# Altium PCB 05-01889R2.3B_发送.PcbDoc
Units mil, origin at the board's own origin, x right, y up, seen from the top; angles counter-clockwise.
Board outline 4710 x 2910 mil, 4 copper layers (Top Layer, Top, Internal Plane 2, VCC, Internal Plane 1, GND, Bottom Layer, Bottom); 47 components, 33 nets, 169 pads, 29 vias.
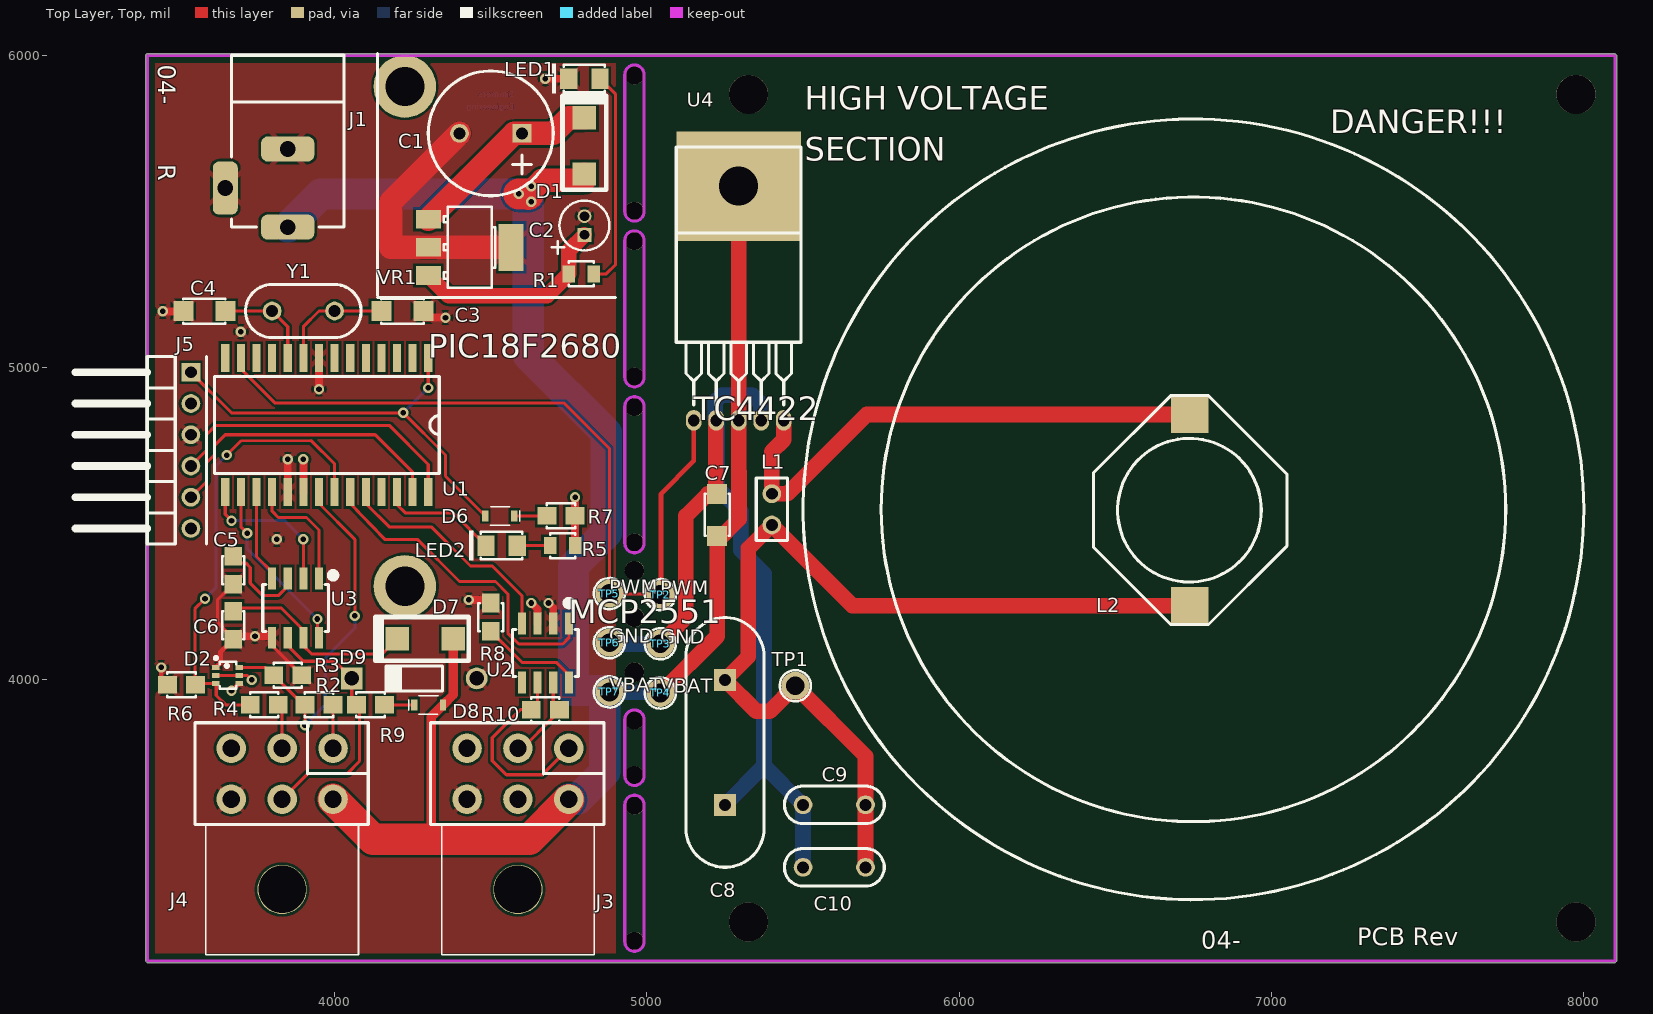
[diagram p0: Top Layer, Top view]
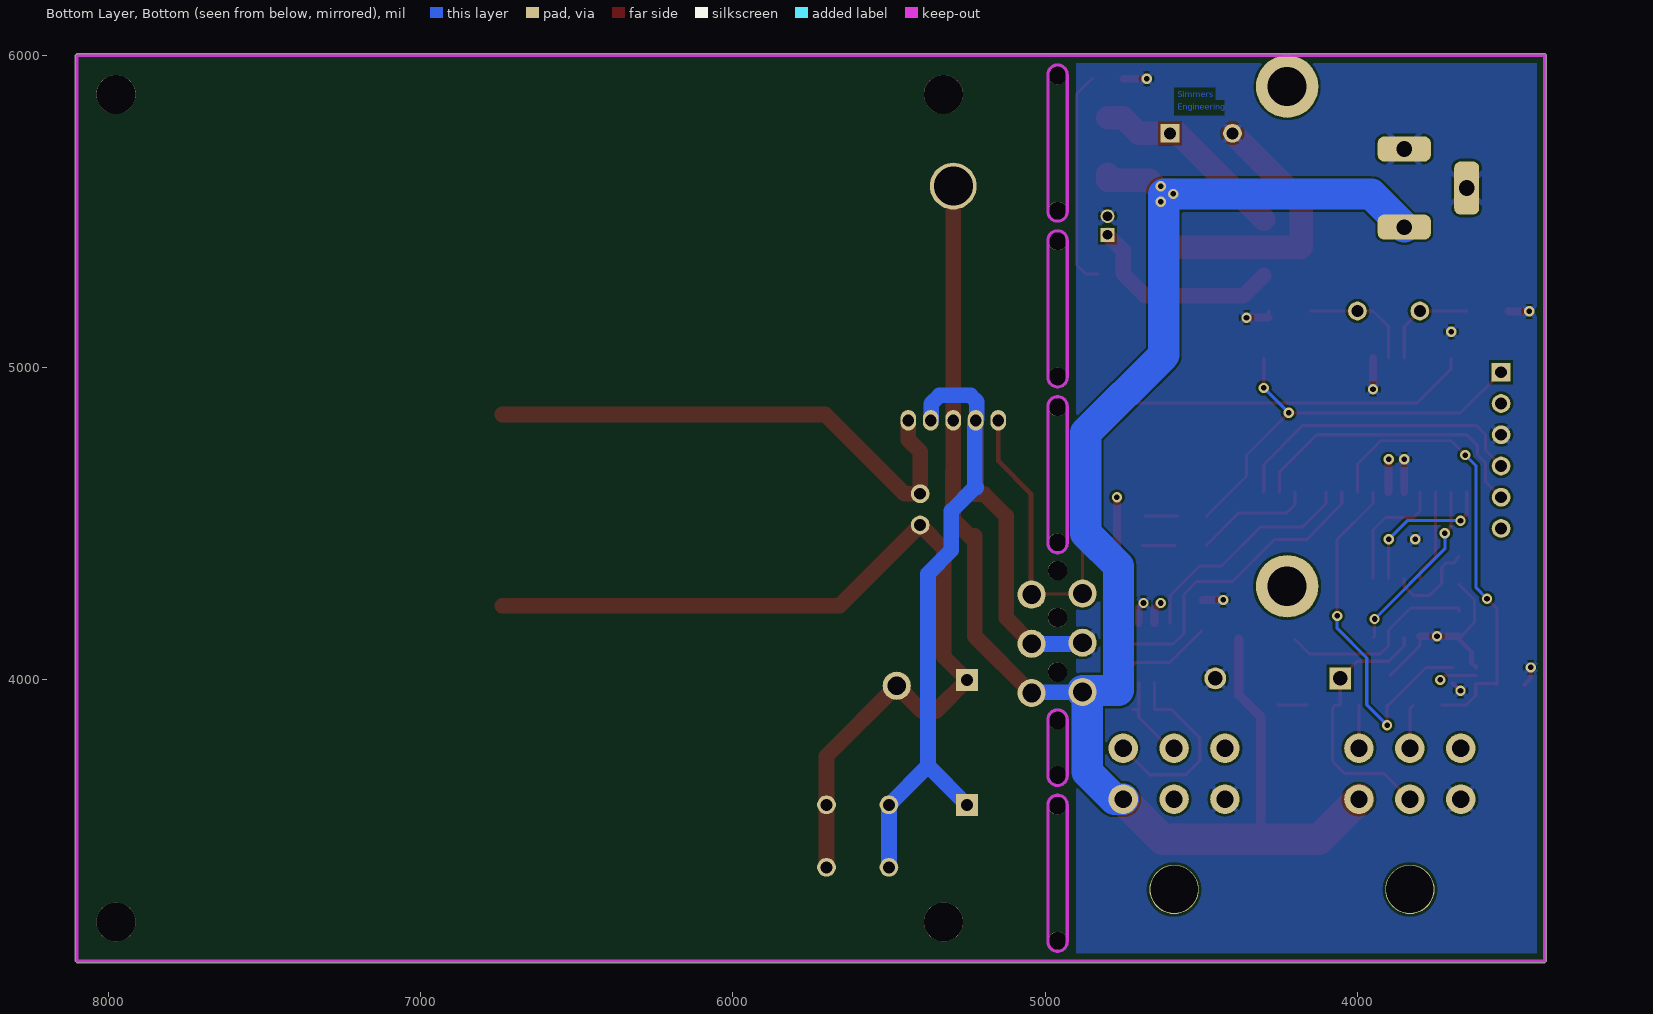
[diagram p1: Bottom Layer, Bottom view, seen from below]
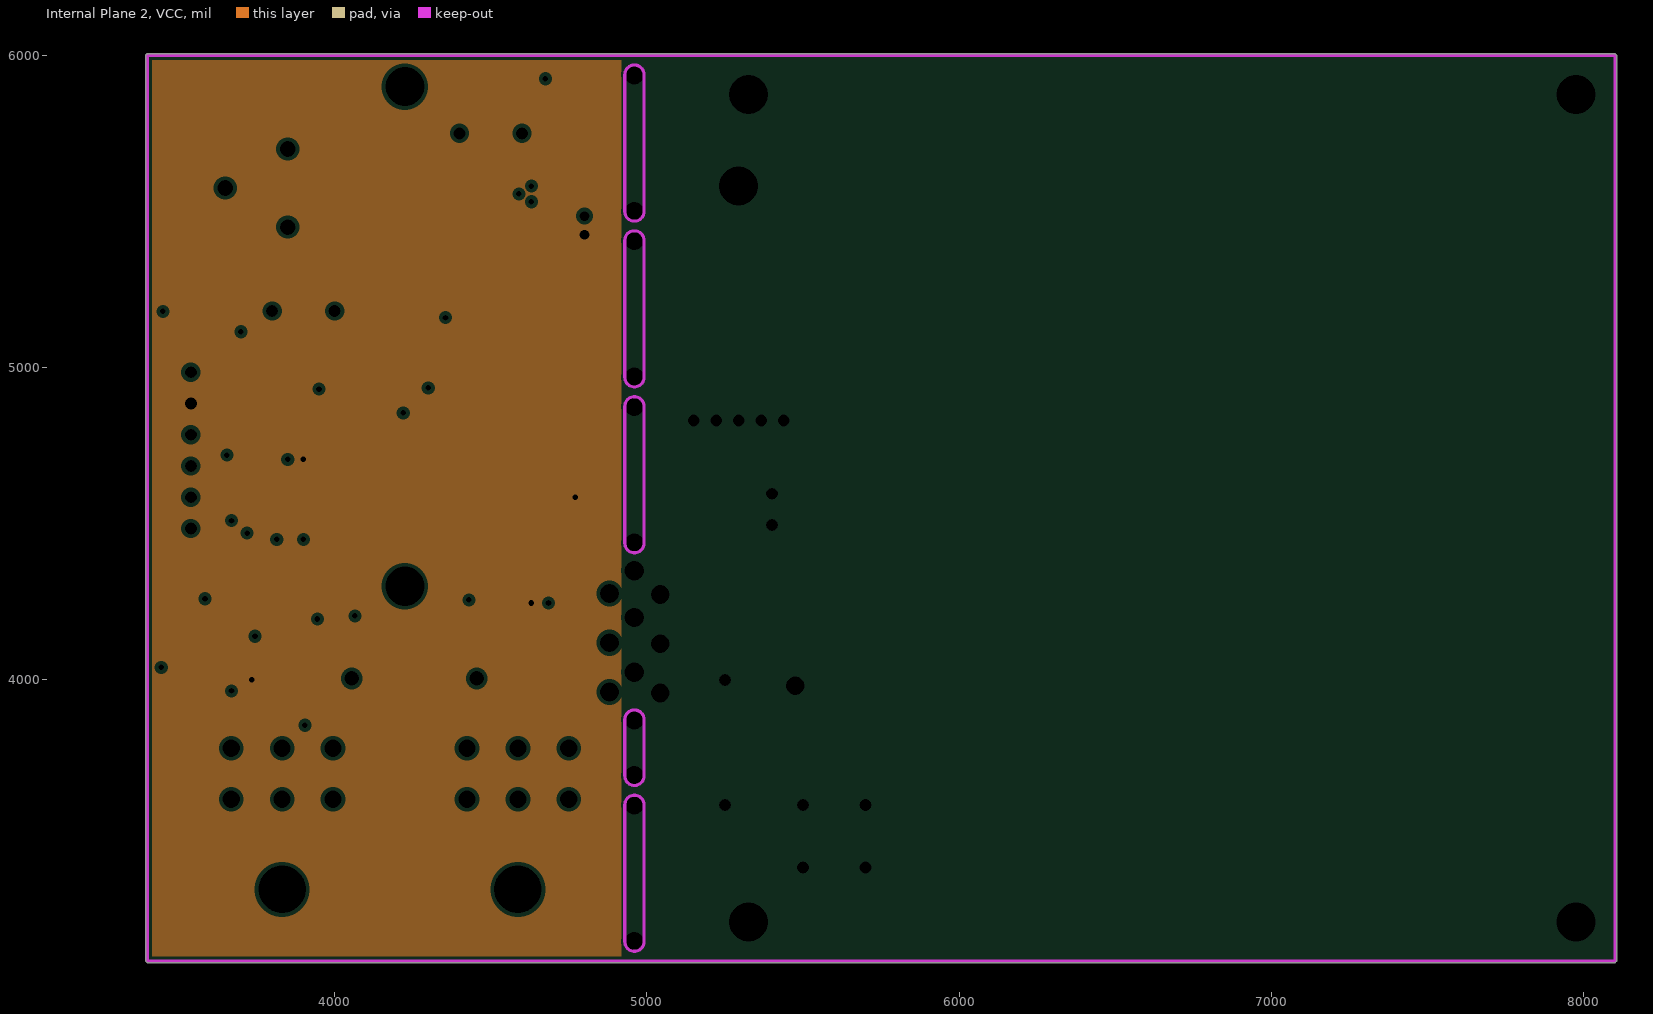
[diagram p2: Internal Plane 2, VCC, clearances drawn from the general rule]
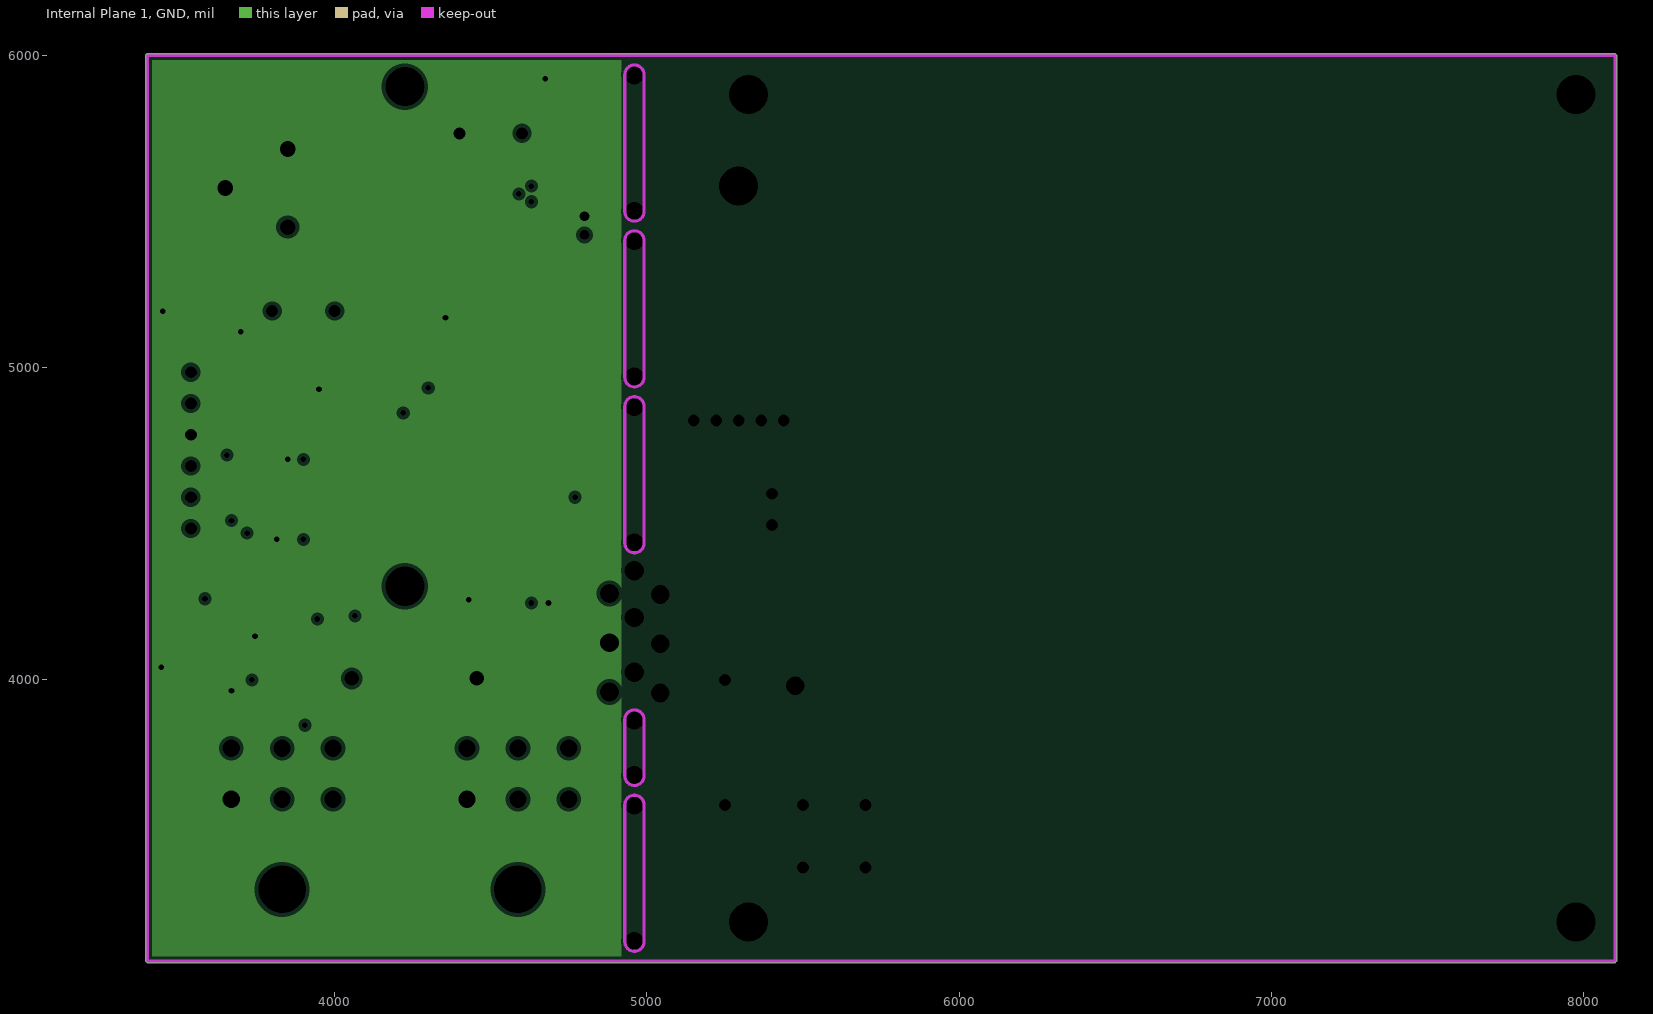
[diagram p3: Internal Plane 1, GND, clearances drawn from the general rule]

## Layer stack, top to bottom
Top Solder, Top Mask: solder mask 0.4, Solder Resist, Dk 3.5
Top Layer, Top: signal copper 1.4
Dielectric1: dielectric 12.6, FR-4, Dk 4.8
Internal Plane 2, VCC: plane copper 1.4
Dielectric3: dielectric 12.6, FR-4, Dk 4.8
Internal Plane 1, GND: plane copper 1.4
Dielectric2: dielectric 12.6, FR-4, Dk 4.8
Bottom Layer, Bottom: signal copper 1.4
Bottom Solder, Bot Mask: solder mask 0.4, Solder Resist, Dk 3.5

## Board outline
3395,3100 3400,3095 8100,3095 8105,3100 8105,6000 8100,6005 3400,6005 3395,6000

## Design rules (kind name [scope] priority, off if disabled: settings)
Clearance "Clearance_Top Layer, Top_PadToPad" [ExistsOnLayer('Top Layer, Top') And IsPad vs ExistsOnLayer('Top Layer, Top') And IsPad] p1: gap=8
Clearance "Clearance_Top Layer, Top_PadToLine" [ExistsOnLayer('Top Layer, Top') And IsPad vs ExistsOnLayer('Top Layer, Top') And IsWire] p2: gap=8
Clearance "Clearance_Top Layer, Top_LineToLine" [ExistsOnLayer('Top Layer, Top') And IsWire vs ExistsOnLayer('Top Layer, Top') And IsWire] p3: gap=8
Clearance "Clearance_Top Layer, Top_ViaToPad" [ExistsOnLayer('Top Layer, Top') And IsVia vs ExistsOnLayer('Top Layer, Top') And IsPad] p4: gap=8
Clearance "Clearance_Top Layer, Top_ViaToLine" [ExistsOnLayer('Top Layer, Top') And IsVia vs ExistsOnLayer('Top Layer, Top') And IsWire] p5: gap=8
Clearance "Clearance_Top Layer, Top_ViaToVia" [ExistsOnLayer('Top Layer, Top') And IsVia vs ExistsOnLayer('Top Layer, Top') And IsVia] p6: gap=8
Clearance "Clearance_Internal Plane 2, VCC_PadToPad" [ExistsOnLayer('Internal Plane 2, VCC') And IsPad vs ExistsOnLayer('Internal Plane 2, VCC') And IsPad] p7: gap=10
Clearance "Clearance_Internal Plane 2, VCC_PadToLine" [ExistsOnLayer('Internal Plane 2, VCC') And IsPad vs ExistsOnLayer('Internal Plane 2, VCC') And IsWire] p8: gap=10
Clearance "Clearance_Internal Plane 2, VCC_LineToLine" [ExistsOnLayer('Internal Plane 2, VCC') And IsWire vs ExistsOnLayer('Internal Plane 2, VCC') And IsWire] p9: gap=10
Clearance "Clearance_Internal Plane 2, VCC_ViaToPad" [ExistsOnLayer('Internal Plane 2, VCC') And IsVia vs ExistsOnLayer('Internal Plane 2, VCC') And IsPad] p10: gap=10
Clearance "Clearance_Internal Plane 2, VCC_ViaToLine" [ExistsOnLayer('Internal Plane 2, VCC') And IsVia vs ExistsOnLayer('Internal Plane 2, VCC') And IsWire] p11: gap=10
Clearance "Clearance_Internal Plane 2, VCC_ViaToVia" [ExistsOnLayer('Internal Plane 2, VCC') And IsVia vs ExistsOnLayer('Internal Plane 2, VCC') And IsVia] p12: gap=10
Clearance "Clearance_Internal Plane 1, GND_PadToPad" [ExistsOnLayer('Internal Plane 1, GND') And IsPad vs ExistsOnLayer('Internal Plane 1, GND') And IsPad] p13: gap=10
Clearance "Clearance_Internal Plane 1, GND_PadToLine" [ExistsOnLayer('Internal Plane 1, GND') And IsPad vs ExistsOnLayer('Internal Plane 1, GND') And IsWire] p14: gap=10
Clearance "Clearance_Internal Plane 1, GND_LineToLine" [ExistsOnLayer('Internal Plane 1, GND') And IsWire vs ExistsOnLayer('Internal Plane 1, GND') And IsWire] p15: gap=10
Clearance "Clearance_Internal Plane 1, GND_ViaToPad" [ExistsOnLayer('Internal Plane 1, GND') And IsVia vs ExistsOnLayer('Internal Plane 1, GND') And IsPad] p16: gap=10
Clearance "Clearance_Internal Plane 1, GND_ViaToLine" [ExistsOnLayer('Internal Plane 1, GND') And IsVia vs ExistsOnLayer('Internal Plane 1, GND') And IsWire] p17: gap=10
Clearance "Clearance_Internal Plane 1, GND_ViaToVia" [ExistsOnLayer('Internal Plane 1, GND') And IsVia vs ExistsOnLayer('Internal Plane 1, GND') And IsVia] p18: gap=10
Clearance "Clearance_Bottom Layer, Bottom_PadToPad" [ExistsOnLayer('Bottom Layer, Bottom') And IsPad vs ExistsOnLayer('Bottom Layer, Bottom') And IsPad] p19: gap=8
Clearance "Clearance_Bottom Layer, Bottom_PadToLine" [ExistsOnLayer('Bottom Layer, Bottom') And IsPad vs ExistsOnLayer('Bottom Layer, Bottom') And IsWire] p20: gap=8
Clearance "Clearance_Bottom Layer, Bottom_LineToLine" [ExistsOnLayer('Bottom Layer, Bottom') And IsWire vs ExistsOnLayer('Bottom Layer, Bottom') And IsWire] p21: gap=8
Clearance "Clearance_Bottom Layer, Bottom_ViaToPad" [ExistsOnLayer('Bottom Layer, Bottom') And IsVia vs ExistsOnLayer('Bottom Layer, Bottom') And IsPad] p22: gap=8
Clearance "Clearance_Bottom Layer, Bottom_ViaToLine" [ExistsOnLayer('Bottom Layer, Bottom') And IsVia vs ExistsOnLayer('Bottom Layer, Bottom') And IsWire] p23: gap=8
Clearance "Clearance_Bottom Layer, Bottom_ViaToVia" [ExistsOnLayer('Bottom Layer, Bottom') And IsVia vs ExistsOnLayer('Bottom Layer, Bottom') And IsVia] p24: gap=8
Clearance Clearance_Design_HoleToHole [(IsVia Or IsThruPin) vs (IsVia Or IsThruPin)] p25: gap=13
Clearance [All] p26: gap=8
PlaneClearance PadClr_125NP [InPadClass('125NP')] p1: clearance=30
PlaneClearance PadClr_P:PX080Y170D050 [InPadClass('P:PX080Y170D050')] p2: clearance=64
PlaneClearance [All] p3: clearance=12
PlaneConnect PadTherm_125NP [InPadClass('125NP')] p1: planeconnectstyle=Relief reliefexpansion=31.25 reliefentries=4 reliefconductorwidth=41.67 reliefairgap=31.25
PlaneConnect PadTherm_1m40 [InPadClass('1m40')] p2: planeconnectstyle=Relief reliefexpansion=13.78 reliefentries=4 reliefconductorwidth=18.37 reliefairgap=13.78
PlaneConnect PadTherm_200R125 [InPadClass('200R125')] p3: planeconnectstyle=Relief reliefexpansion=31.25 reliefentries=4 reliefconductorwidth=41.67 reliefairgap=31.25
PlaneConnect PadTherm_3m86 [InPadClass('3m86')] p4: planeconnectstyle=Relief reliefexpansion=37.99 reliefentries=4 reliefconductorwidth=50.66 reliefairgap=37.99
PlaneConnect PadTherm_60R38 [InPadClass('60R38')] p5: planeconnectstyle=Relief reliefexpansion=9.5 reliefentries=4 reliefconductorwidth=12.67 reliefairgap=9.5
PlaneConnect PadTherm_60S38 [InPadClass('60S38')] p6: planeconnectstyle=Relief reliefexpansion=9.5 reliefentries=4 reliefconductorwidth=12.67 reliefairgap=9.5
PlaneConnect PadTherm_62NP [InPadClass('62NP')] p7: planeconnectstyle=Relief reliefexpansion=15.5 reliefentries=4 reliefconductorwidth=20.67 reliefairgap=15.5
PlaneConnect PadTherm_90R60 [InPadClass('90R60')] p8: planeconnectstyle=Relief reliefexpansion=11 reliefentries=4 reliefconductorwidth=14 reliefairgap=4
PlaneConnect "PadTherm_P:EX120Y120D68A [2]" [InPadClass('P:EX120Y120D68A [2]')] p9: planeconnectstyle=Relief reliefexpansion=0 reliefentries=4 reliefconductorwidth=0 reliefairgap=0
PlaneConnect PadTherm_P:EX60Y60D38A [InPadClass('P:EX60Y60D38A')] p10: planeconnectstyle=Relief reliefexpansion=9.5 reliefentries=4 reliefconductorwidth=12.67 reliefairgap=9.5
PlaneConnect "PadTherm_P:EX70Y70D46A [3]" [InPadClass('P:EX70Y70D46A [3]')] p11: planeconnectstyle=Relief reliefexpansion=11.5 reliefentries=4 reliefconductorwidth=15.33 reliefairgap=11.5
PlaneConnect PadTherm_P:PX080Y170D050 [InPadClass('P:PX080Y170D050')] p12: planeconnectstyle=Relief reliefexpansion=50 reliefentries=4 reliefconductorwidth=25 reliefairgap=15
PlaneConnect PadTherm_P:S150X80Y [InPadClass('P:S150X80Y')] p13: planeconnectstyle=Relief reliefexpansion=0 reliefentries=4 reliefconductorwidth=0 reliefairgap=0
PlaneConnect PadTherm_P:S60X80Y [InPadClass('P:S60X80Y')] p14: planeconnectstyle=Relief reliefexpansion=0 reliefentries=4 reliefconductorwidth=0 reliefairgap=0
PlaneConnect PadTherm_P:SX0.42Y0.6D0T [InPadClass('P:SX0.42Y0.6D0T')] p15: planeconnectstyle=Relief reliefexpansion=0 reliefentries=4 reliefconductorwidth=0 reliefairgap=0
PlaneConnect PadTherm_P:SX20Y35D0T [InPadClass('P:SX20Y35D0T')] p16: planeconnectstyle=Relief reliefexpansion=0 reliefentries=4 reliefconductorwidth=0 reliefairgap=0
PlaneConnect PadTherm_P:SX40Y55D0T [InPadClass('P:SX40Y55D0T')] p17: planeconnectstyle=Relief reliefexpansion=0 reliefentries=4 reliefconductorwidth=0 reliefairgap=0
PlaneConnect PadTherm_P:SX55Y65D0T [InPadClass('P:SX55Y65D0T')] p18: planeconnectstyle=Relief reliefexpansion=0 reliefentries=4 reliefconductorwidth=0 reliefairgap=0
PlaneConnect PadTherm_P:SX60Y56D0T [InPadClass('P:SX60Y56D0T')] p19: planeconnectstyle=Relief reliefexpansion=0 reliefentries=4 reliefconductorwidth=0 reliefairgap=0
PlaneConnect PadTherm_P:SX60Y60D38A [InPadClass('P:SX60Y60D38A')] p20: planeconnectstyle=Relief reliefexpansion=9.5 reliefentries=4 reliefconductorwidth=12.67 reliefairgap=9.5
PlaneConnect PadTherm_P:SX64Y64D0T [InPadClass('P:SX64Y64D0T')] p21: planeconnectstyle=Relief reliefexpansion=0 reliefentries=4 reliefconductorwidth=0 reliefairgap=0
PlaneConnect PadTherm_P:SX70Y26D0T [InPadClass('P:SX70Y26D0T')] p22: planeconnectstyle=Relief reliefexpansion=0 reliefentries=4 reliefconductorwidth=0 reliefairgap=0
PlaneConnect PadTherm_P:SX70Y70D38A [InPadClass('P:SX70Y70D38A')] p23: planeconnectstyle=Relief reliefexpansion=15.5 reliefentries=4 reliefconductorwidth=15.33 reliefairgap=11.5
PlaneConnect PadTherm_P:SX70Y70D46A [InPadClass('P:SX70Y70D46A')] p24: planeconnectstyle=Relief reliefexpansion=11.5 reliefentries=4 reliefconductorwidth=15.33 reliefairgap=11.5
PlaneConnect PadTherm_P:SX75Y75D0T [InPadClass('P:SX75Y75D0T')] p25: planeconnectstyle=Relief reliefexpansion=0 reliefentries=4 reliefconductorwidth=0 reliefairgap=0
PlaneConnect PadTherm_P:SX90Y26D0T [InPadClass('P:SX90Y26D0T')] p26: planeconnectstyle=Relief reliefexpansion=0 reliefentries=4 reliefconductorwidth=0 reliefairgap=0
PlaneConnect PadTherm_P:X400Y350D125 [InPadClass('P:X400Y350D125')] p27: planeconnectstyle=Relief reliefexpansion=27.5 reliefentries=4 reliefconductorwidth=40 reliefairgap=30
PlaneConnect PadTherm_P:X50Y66R38 [InPadClass('P:X50Y66R38')] p28: planeconnectstyle=Relief reliefexpansion=7.25 reliefentries=4 reliefconductorwidth=11.67 reliefairgap=8.75
PlaneConnect PadTherm_P44R31 [InPadClass('P44R31')] p29: planeconnectstyle=Relief reliefexpansion=1.5 reliefentries=4 reliefconductorwidth=12.67 reliefairgap=3
PlaneConnect PadTherm_P44S31 [InPadClass('P44S31')] p30: planeconnectstyle=Relief reliefexpansion=0.5 reliefentries=4 reliefconductorwidth=12.67 reliefairgap=4
PlaneConnect [All] p31: planeconnectstyle=Relief reliefexpansion=20 reliefentries=4 reliefconductorwidth=10 reliefairgap=10
PolygonConnect PolygonConnect_4 [IsPolygon And InNet('GND') And OnLayer('Bottom Layer, Bottom') vs IsVia] p1: connectstyle=Relief reliefconductorwidth=15 reliefentries=4 polygonreliefangle="45 Angle" airgapwidth=10
PolygonConnect PolygonConnect_3 [IsPolygon And InNet('GND') And OnLayer('Bottom Layer, Bottom') vs IsPad] p2: connectstyle=Relief reliefconductorwidth=15 reliefentries=4 polygonreliefangle="45 Angle" airgapwidth=10
PolygonConnect PolygonConnect_2 [IsPolygon And InNet('GND') And OnLayer('Top Layer, Top') vs IsVia] p3: connectstyle=Relief reliefconductorwidth=15 reliefentries=4 polygonreliefangle="45 Angle" airgapwidth=10
PolygonConnect PolygonConnect_1 [IsPolygon And InNet('GND') And OnLayer('Top Layer, Top') vs IsPad] p4: connectstyle=Relief reliefconductorwidth=15 reliefentries=4 polygonreliefangle="45 Angle" airgapwidth=10
PolygonConnect [All] p5: connectstyle=Relief reliefconductorwidth=10 reliefentries=4 polygonreliefangle="90 Angle" airgapwidth=10
RoutingVias [All] p1: holewidth=28 width=50 viastyle="Through Hole" minholewidth=28 minwidth=50 maxholewidth=28 maxwidth=50
SilkToSolderMaskClearance SilkscreenOverComponentPads [IsPad] p1: minsilkscreentomaskgap=10 clearancetoexposedcopper=TRUE
SolderMaskExpansion [All] p1: expansion=4
Width [All] p1: maxlimit=10 minlimit=10 preferedwidth=10
27 further rules are at their usual default settings.

## Classes and differential pairs
pad class P44S31: C2-1
pad class P44R31: C2-2
pad class P:X50Y66R38: U4-1 U4-2 U4-3 U4-4 U4-5
pad class P:X400Y350D125: U4-6
pad class P:SX90Y26D0T: U1-1 U1-2 U1-3 U1-4 U1-5 U1-6 U1-7 U1-8 U1-9 U1-10 U1-11 U1-12 U1-13 U1-14 U1-15 U1-16 U1-17 U1-18 U1-19 U1-20 U1-21 U1-22 U1-23 U1-24 U1-25 U1-26 U1-27 U1-28
pad class P:SX75Y75D0T: D1-1 D1-2 D7-1 D7-2
pad class P:SX70Y70D46A: D9-K
pad class P:SX70Y70D38A: C8-1 C8-2
pad class P:SX70Y26D0T: U2-1 U2-2 U2-3 U2-4 U2-5 U2-6 U2-7 U2-8 U3-1 U3-2 U3-3 U3-4 U3-5 U3-6 U3-7 U3-8
pad class P:SX64Y64D0T: C3-1 C3-2 C4-1 C4-2 C7-1 C7-2
pad class P:SX60Y60D38A: J5-1
pad class P:SX60Y56D0T: C5-A C5-B C6-A C6-B R2-1 R2-2 R3-1 R3-2 R4-1 R4-2 R6-1 R6-2 R7-1 R7-2 R8-1 R8-2 R9-1 R9-2 R10-1 R10-2
pad class P:SX55Y65D0T: LED1-1 LED1-2 LED2-1 LED2-2
pad class P:SX40Y55D0T: R1-1 R1-2 R5-1 R5-2
pad class P:SX20Y35D0T: D6-1 D6-2 D8-1 D8-2
pad class P:SX0.42Y0.6D0T: D2-1 D2-2 D2-3 D2-4 D2-5 D2-6
pad class P:S60X80Y: VR1-1 VR1-2 VR1-3
pad class P:S150X80Y: VR1-4
pad class P:PX080Y170D050: J1-1 J1-2 J1-3
pad class "P:EX70Y70D46A [3]": D9-A
pad class P:EX60Y60D38A: C9-1 C9-2 C10-1 C10-2 J5-2 J5-3 J5-4 J5-5 J5-6
pad class "P:EX120Y120D68A [2]": L2-1 L2-2
pad class 90R60: TP1-1 TP2-1 TP3-1 TP4-1 TP5-1 TP6-1 TP7-1
pad class 62NP: Free-0
pad class 60S38: C1-1
pad class 60R38: C1-2 L1-1 L1-2 Y1-1 Y1-2
pad class 3m86: J3-7 J4-7
pad class 200R125: Free-0
pad class 1m40: J3-1 J3-2 J3-3 J3-4 J3-5 J3-6 J4-1 J4-2 J4-3 J4-4 J4-5 J4-6
pad class 125NP: Free-0

## Components (designator, comment, footprint, x,y, rotation, side; value= is the part's Value field where it differs from the comment)
C1 "10uF" CAPRAD400D200SP 4600,5750 r270 top
C2 "47uF" CAPRAD160D60SP 4800,5425 r180 top
C3 "20pF" CC1206 4150,5181.2 r0 top
C4 "20pF" CC1206 3650,5181.2 r180 top
C5 "1.0uF" CAP0805_CAP0805(Primary) 3675,4396.2 r270 top
C6 "1.0uF" CAP0805_CAP0805(Primary) 3675,4220 r270 top
C7 "0.1uF" CC1206 5225,4461.2 r90 top
C8 "10nF" CAP-ECQ-P4103JU 5250,4000 r270 top
C9 ".200LS" CAP-200LS-NONPOLAR 5700,3600 r180 top
C10 ".200LS" CAP-200LS-NONPOLAR 5700,3400 r180 top
D1 "10MQ100N" DIO-SMAJXXCA 4800,5800 r0 top
D2 "" SOT-363 3620,4040 r270 top
D6 "" DIO-SOD-323 4575,4525 r180 top
D7 "10MQ100N" DIO-SMAJXXCA 4200,4131.2 r90 top
D8 "" DIO-SOD-323 4255,3920 r0 top
D9 "1N4750" DO-41_1N4728_DO-41(Primary) 4055,4005 r0 top
J1 "{Value}" CNN-DC-MOD-2.5MM 3850,5450 r180 top
J3 "" AMP770969 4750,3781.2 r270 top
J4 "" AMP770969 3995,3781.2 r270 top
J5 "{Value}" HDR_1X6_PICKIT2 3540,4985 r0 top
L1 "10-00189" IND-AIR-10-00189-500V 5400,4596.2 r270 top
L2 "DO5022P" IND-DO5022P-SMT 6737.5,4849.95 r270 top
LED1 "GRN" LED-SML-LX231C-TR-RED-2MM-3MM 4750,5925 r0 top
LED2 "Yellow" LED-SML-LX231C-TR-RED-2MM-3MM 4485,4430 r0 top
R1 "1K" RES0805#1 4750,5300 r0 top
R2 "25K" RES0805#2 3905,3920 r0 top
R3 "15K" RES0805#2 3805,4015 r0 top
R4 "25K" RES0805#2 3730,3920 r0 top
R5 "270" RES0805#1 4770,4430 r180 top
R6 "15K" RES0805#2 3555,3985 r180 top
R7 "" RES0805#2 4770,4525 r180 top
R8 "4.7K" RES0805#2 4500,4156.2 r90 top
R9 "1K" RES0805#2 4160,3920 r180 top
R10 "120" RES0805#2 4720,3905 r180 top
TP1 "" TSP-P90R60 5475,3981.2 r0 top
TP2 "PWM" TSP-P90R60 5043.11,4273.21 r0 top
TP3 "GND" TSP-P90R60 5043.11,4115.73 r0 top
TP4 "VBAT" TSP-P90R60 5043.11,3958.25 r0 top
TP5 "PWM" TSP-P90R60 4880,4276.55 r0 top
TP6 "GND" TSP-P90R60 4880,4119.07 r0 top
TP7 "VBAT" TSP-P90R60 4880,3961.59 r0 top
U1 "PIC18F2680" SO28-3 4300,5031.2 r270 top
U2 "MCP2551" SO8_150 4750,4181.2 r270 top
U3 "" SO8_150 3950,4325 r270 top
U4 "TC4422" TO220-5LEAD-TAB 5150,4831.2 r0 top
VR1 "LM2937ET-5.0" SOT223 4300,5475 r270 top
Y1 "20.0MHz" XTL-200LS-PTH-CAN 3800,5181.2 r90 top

## Footprints (in the part's own frame and the unit in brackets; to place one, negate y for a bottom-side part, rotate by r counter-clockwise, add the part's x,y. Pads: shape width x height; smd on the part's side, far side on the other; paste and mask are expansions set on the pad)
AMP770969 [mm]
  round 2.4 hole 1.4: 1(0,0) 2(0,-4.14) 3(0,-8.28) 4(4.14,0) 5(4.14,-4.14) 6(4.14,-8.28)
  round 4 hole 3.86: 7(11.48,-4.14)
  silkscreen extent -2.07,-11.24 16.81,2.86
CAP0805_CAP0805(Primary) [mil]
  rect 60x56 smd: A(0,0) B(90,0)
  silkscreen extent 0,-35 90,35
CAP-200LS-NONPOLAR [mil]
  round 60 hole 38: 1(0,0) 2(200,0)
  silkscreen extent -60,-60 260,60
CAP-ECQ-P4103JU [mil]
  rect 70x70 hole 38: 1(0,0) 2(400,0)
  silkscreen extent -200,-125 600,125
CAPRAD160D60SP [mil]
  rect 44x44 hole 31: 1(0,0)
  round 44 hole 31: 2(0,-60)
  silkscreen extent -80,-110 105,60
CAPRAD400D200SP [mil]
  rect 60x60 hole 38: 1(0,0)
  round 60 hole 38: 2(0,-200)
  silkscreen extent -200,-300 200,100
CC1206 [mil]
  rect 64x64 smd: 1(0,0) 2(134,0)
  silkscreen extent 0,-40 135,40
CNN-DC-MOD-2.5MM [mil]
  rrect50% 170x80 hole 50: 1(0,0) 2(0,-250)
  rrect50% 80x170 hole 50: 3(200,-125)
  silkscreen extent -180,-550 180,0
DIO-SMAJXXCA [mil]
  rect 75x75 smd: 1(0,0) 2(0,-180)
  silkscreen extent -70,-230 70,70
DIO-SOD-323 [mil]
  rect 20x35 smd: 1(92.5,0) 2(0,0)
  silkscreen extent -18,-30 76,30
DO-41_1N4728_DO-41(Primary) [mil]
  round 70 hole 46: A(400,0)
  rect 70x70 hole 46: K(0,0)
  silkscreen extent 110,-40 290,40
HDR_1X6_PICKIT2 [mil]
  rect 60x60 hole 38: 1(0,0)
  round 60 hole 38: 2(0,-100) 3(0,-200) 4(0,-300) 5(0,-400) 6(0,-500)
  silkscreen extent -370,-550 50,50
IND-AIR-10-00189-500V [mil]
  round 60 hole 38: 1(0,0) 2(100,0)
  silkscreen extent -1200,-50 1300,2600
IND-DO5022P-SMT [mil]
  rect 120x120 smd: 1(0,0) 2(612.2,0)
  silkscreen extent -61,-307 672,312
LED-SML-LX231C-TR-RED-2MM-3MM [mil]
  rect 55x65 smd: 1(0,0) 2(100,0)
  silkscreen extent -53,-47 116,47
RES0805#1 [mil]
  rect 40x55 smd: 1(0,0) 2(80,0)
  silkscreen extent 0,-40 80,40
RES0805#2 [mil]
  rect 60x56 smd: 1(0,0) 2(90,0)
  silkscreen extent 0,-40 90,40
SO8_150 [mil]
  rect 70x26 smd: 1(0,0) 2(0,-50) 3(0,-100) 4(0,-150) 5(190,-150) 6(190,-100) 7(190,-50) 8(190,0)
  silkscreen extent -75,-180 170,30
SO28-3 [mil]
  rect 90x26 smd: 1(0,0) 2(0,-50) 3(0,-100) 4(0,-150) 5(0,-200) 6(0,-250) 7(0,-300) 8(0,-350) 9(0,-400) 10(0,-450) 11(0,-500) 12(0,-550) 13(0,-600) 14(0,-650) 15(430,-650) 16(430,-600) 17(430,-550) 18(430,-500) 19(430,-450) 20(430,-400) 21(430,-350) 22(430,-300) 23(430,-250) 24(430,-200) 25(430,-150) 26(430,-100) 27(430,-50) 28(430,0)
  silkscreen extent 60,-685 370,35
SOT223 [mil]
  rect 60x80 smd: 1(0,0) 2(90,0) 3(180,0)
  rect 150x80 smd: 4(90,265)
  silkscreen extent -40,50 220,215
SOT-363 [mm]
  rect 0.42x0.6 smd: 1(0,0) 2(0.65,0) 3(1.3,0) 4(1.3,1.9) 5(0.65,1.9) 6(0,1.9)
  silkscreen extent -0.89,-0.13 1.74,1.66
TO220-5LEAD-TAB [mil]
  oval 50x66 hole 38: 1(0,0) 2(72,0) 3(144,0) 4(216,0) 5(288,0)
  rect 400x350 / inner round 150 / far side round 150 hole 125: 6(144,750)
  silkscreen extent -56,50 344,875
TSP-P90R60 [mil]
  round 90 hole 60: 1(0,0)
  silkscreen extent -50,-50 50,50
XTL-200LS-PTH-CAN [mil]
  round 60 hole 38: 1(0,0) 2(0,-200)
  silkscreen extent -85,-285 85,85

## Part data
C5 C6: "Capacitor"
D6 D8: "Leadless Schottky Rectifier, 1 Ampere"
D9: "Glass Zener Diode, 500 Milliwatt"
LED1 LED2: "Light Emitting Diode"

## Free pads (board coordinates)
  round 200 hole 125: 0(4225,4300) 0(4225,5900)
  round 62 hole 62 unplated: 0(4960,3162) 0(4960,3600) 0(4960,3693) 0(4960,3873) 0(4960,4025) 0(4960,4200) 0(4960,4350) 0(4960,4438) 0(4960,4876) 0(4960,4969) 0(4960,5407) 0(4960,5500) 0(4960,5938)
  round 125 hole 125 unplated: 0(5325,3224.95) 0(5325,5874.95) 0(7975,3224.95) 0(7975,5874.95)

## Via types
v1: diameter 33, hole 18, Top Layer, Top to Bottom Layer, Bottom, 29 vias

## Nets (pads, with @x,y where several pads share a name; then routed paths per layer and width w, separated by ;. In a path a pad name is that pad's centre, name@x,y a point inside that pad or via, vN(x,y) a via of type N, cw(c..) or ccw(c..) an arc to the next point about the centre after c; other vN are vias at no path point)
GND: C1.2 C2.2 C3.2 C4.2 C5.B C6.B C7.2 C8.2 C9.2 C10.2 D2.1 D2.4 D9.A J1.2 J1.3 J3.6 J4.6 J5.3 LED1.1 R3.2 R6.2 R8.2 TP3.1 TP6.1 U1.8 U1.19 U2.2 U3.5 U4.2 U4.4 VR1.2 VR1.4 | length 5139.8
  Top Layer, Top w10: C6.B@3675,4140 C6.B 3625,4186.2 3625,4256.2 C5.B ; U3.5@3800,4140 U3.5 3800,4110 3865,4045 R3.2 ; C3.2 4284,5167.2 C3.2@4285,5160 ; R8.2@4495,4256.2 4500,4251.2 R8.2
  Top Layer, Top w15: v1(3445,4040) 3445,4005 R6.2 ; D2.1 3635,4055 3635,4090 C6.B ; v1(3670,3965) 3670.98,3965 D2.4
  Top Layer, Top w25: v1(3450,5180) 3515,5180 C4.2 ; C6.B@3675,4140 v1(3745,4140) U3.5@3800,4140 ; U1.19 v1(3850,4706.2) ; v1(3950,4931.2) U1.8 ; C3.2@4285,5160 v1(4355,5160) ; v1(4430,4256.2) R8.2@4495,4256.2 ; v1(4675,5925) LED1.1 ; v1(4685,4246.2) 4700,4231.2 U2.2
  Top Layer, Top w50: TP3.1 5043.11,4116.31 5044,4117.2 5125,4200 5125,4525 5195.2,4595.2 C7.2@5224.8,4595.2 ; U4.2 5221.2,4831.2 5220,4830 5220,4600 C7.2@5224.8,4595.2 ; C7.2@5224.8,4595.2 C7.2 C7.2@5224.8,4595.2
  Top Layer, Top w75: C1.2 4180,5530 4180,5385 VR1.2 4560,5385 VR1.4
  Bottom Layer, Bottom w50: TP6.1 4884.07,4115 5040,4115 5040.73,4115.73 TP3.1 ; 5220,4616.2 5225,4616.2 ; C8.2 5375,3725 ; U4.4 5365,4831.2 5365,4884.2 5338,4911.2 5239,4911.2 5219,4891.2 5219,4834.2 U4.2 5225,4831.2 5225,4616.2 ; C10.2 C9.2 5375,3725 ; 5225,4616.2 5300,4541.2 5300,4416.2 5375,4340 5375,3725
  other v1: 3815,4450 3700,5115
N17857: C3.1 U1.9 Y1.2 | length 370.7
  Top Layer, Top w10: U1.9 3900,5131.2 3950,5181.2 Y1.2 C3.1
N17918: C4.1 U1.10 Y1.1 | length 320.7
  Top Layer, Top w10: C4.1 Y1.1 3850,5131.2 U1.10
N18217: D6.1 J5.1 U1.1 | length 1381.9
  Top Layer, Top w10: J5.1 3670,4855 v1(4220,4855) 4355,4720 4355,4652.5 D6.1 ; v1(4300,4935) U1.1
  Bottom Layer, Bottom w10: v1(4220,4855) v1(4300,4935)
N18258: D6.2 R7.2 | length 105
  Top Layer, Top w10: D6.2 R7.2
N18506: U1.15 U3.2 | length 479.3
  Top Layer, Top w10: U1.15 3650,4530 v1(3670,4510) ; U3.2 v1(3900,4450)
  Bottom Layer, Bottom w10: v1(3670,4510) 3840,4510 v1(3900,4450)
N18553: U1.18 U3.1 | length 391.1
  Top Layer, Top w10: U1.18 3800,4540 3820,4520 3910,4520 3950,4480 3950,4345 U3.1
N18703: U1.17 U3.4 | length 296.9
  Top Layer, Top w10: U1.17 3750,4395 3800,4345 U3.4
N18865: U1.16 U3.8 | length 569.8
  Top Layer, Top w10: U1.16 3700,4490 v1(3720,4470) ; v1(3945,4195) 3945,4140 U3.8
  Bottom Layer, Bottom w10: v1(3720,4470) 3720,4420 v1(3945,4195)
N19404: D9.K J4.5 R9.2 U3.6 | length 856.1
  Top Layer, Top w10: J4.5 3913.8,3700 4040,3700 4080,3740 4080,3910 R9.2 4055,3920 D9.K 4000,4060 3900,4060 3850,4110 U3.6
N62567: U1.23 U2.1 | length 1051.8
  Top Layer, Top w10: U1.23 4050,4565 4160,4450 4265,4450 4400,4315 4515,4315 4555,4275 4555,4150 4590,4115 4730,4115 4750,4135 U2.1
N62711: U1.24 U2.4 | length 747.2
  Top Layer, Top w10: U1.24 4100,4565 4175,4490 4310,4490 4435,4365 4505,4365 4600,4270 U2.4
N68412: C6.A D7.1 U3.7 | length 645.7
  Top Layer, Top w10: C6.A 3675,4230 3830,4230 3900,4160 U3.7 3900,4110 3926.86,4083.14 4153.14,4083.14 4200,4130 D7.1
N68746: D8.2 R9.1 | length 95
  Top Layer, Top w10: R9.1 D8.2
N71335: C5.A U3.3 | length 296.2
  Top Layer, Top w10: C5.A 3690,4375 3715,4375 3730,4360 3730,4310 3770,4270 3820,4270 3850,4300 U3.3
N74400: D2.6 R2.1 R3.1 U1.21 | length 1185
  Top Layer, Top w10: D2.6 3780,4040 R3.1 3900,3920 R2.1 v1(3905,3855) ; U1.21 3950,4565 4065,4450 v1(4065,4205)
  Bottom Layer, Bottom w10: v1(3905,3855) 3970,3920 3970,4070 4065,4165 v1(4065,4205)
N82912: J5.4 U1.28 | length 983.7
  Top Layer, Top w10: J5.4 3590,4735 3590,4785 3620,4815 4175,4815 4300,4690 U1.28
N84671: J5.5 U1.27 | length 959.1
  Top Layer, Top w10: J5.5 3590,4635 3590,4695 3615,4720 3615,4750 3650,4785 4130,4785 4250,4665 U1.27
N92818: J3.2 R10.1 U2.7 | length 286.1
  Top Layer, Top w10: J3.2 4588.21,3780 4600,3780 4700,3880 R10.1@4700,3905 ; U2.7 R10.1@4700,3905 ; R10.1 R10.1@4700,3905
N93019: J3.1 R10.2 U2.6 | length 641.1
  Top Layer, Top w10: U2.6 4650,3905 R10.2 4595,3905 4505,3815 4505,3796.2 4505,3785 4505,3741.2 4550,3696.2 4665,3696.2 J3.1
N116589: LED2.2 R5.2 | length 105
  Top Layer, Top w10: LED2.2 R5.2
N116601: LED2.1 U1.26 | length 379.3
  Top Layer, Top w10: U1.26 4200,4561.2 4226.2,4535 4380,4535 LED2.1
N130607: L1.1 L2.1 U4.5 | length 1693.3
  Top Layer, Top w50: U4.5 5438,4769.2 5400,4731.2 L1.1 5450,4596.2 5703.75,4849.95 L2.1
N130611: C8.1 C9.1 C10.1 L1.2 L2.2 TP1.1 | length 2977.3
  Top Layer, Top w50: C10.1 C9.1 5700,3756.2 TP1.1 5393.8,3900 5350,3900 C8.1 5325,4075 5325,4421.2 L1.2 5658.45,4237.75 L2.2
N136461: C1.1 D1.1 VR1.1 | length 646.3
  Top Layer, Top w60: C1.1@4605,5750 C1.1 ; C1.1 4601.66,5750 C1.1
  Top Layer, Top w75: VR1.1 4575,5750 C1.1 C1.1@4605,5750 ; C1.1@4601.66,5750 C1.1@4605,5750 ; D1.1 4750,5800 4700,5750 C1.1@4605,5750
N136561: LED1.2 R1.2 | length 698.1
  Top Layer, Top w10: R1.2 4870,5300 4900,5330 4900,5875 LED1.2
N623417: R8.1 U2.8 | length 333
  Top Layer, Top w10: R8.1 4600,4056.2 4710,4056.2 4750,4016.2 U2.8
NET00000: J4.1 R2.2 | length 138.8
  Top Layer, Top w10: J4.1 R2.2
NET00001: D2.3 R4.1 R6.1 U1.22 | length 1490.9
  Top Layer, Top w10: v1(3585,4260) 3552.71,4227.71 3552.71,3987.29 R6.1 3558.82,3988.82 D2.3 3621.18,3988.82 3621.18,3950 3651.18,3920 R4.1 ; v1(3655,4720) 3700,4765 3925,4766.2 4000,4691.2 U1.22
  Bottom Layer, Bottom w10: v1(3585,4260) 3620,4295 3620,4685 v1(3655,4720)
NET00002: J4.2 R4.2 | length 143.8
  Top Layer, Top w10: R4.2 3832.01,3907.99 J4.2
PWM: TP2.1 TP5.1 U1.13 U4.1 | length 2553.7
  Top Layer, Top w10: U1.13 3700,4996.2 3810,4886.2 4735,4886.2 4880,4741.2 TP5.1 4883.45,4276.55 4885,4275 5043.8,4275 5043.11,4274.31 TP2.1
  Top Layer, Top w15: TP2.1 5043.11,4274.31 5043.8,4275 5045,4276.2 5045,4595 5150,4701.2 U4.1
VBAT: C7.1 D1.2 D7.2 D8.1 J1.1 J3.4 J4.4 TP4.1 TP7.1 U4.3 U4.6 | length 6853.1
  Top Layer, Top w15: v1(4630,5531.2) 4620,5541.2 4620,5555 4620,5571.2 v1(4630,5581.2)
  Top Layer, Top w30: 4310,3490 4310,3882.5 D8.1 4380,3952.5 D7.2
  Top Layer, Top w50: TP4.1 5225,4140 C7.1@5225,4445 ; U4.6 U4.3 5294,4667.2 5295,4666.2 5295,4515 C7.1@5225,4445 ; C7.1@5225,4445 C7.1 C7.1@5225,4445
  Top Layer, Top w75: 4620,5555 4665,5600 4800,5600 D1.2
  Top Layer, Top w94.49: J3.4@4750,3616.2 J3.4
  Top Layer, Top w100: J4.4 4123.21,3490 4310,3490 4623.8,3490 J3.4@4750,3616.2 ; v1(4590,5556.2) 4620,5555
  Bottom Layer, Bottom w50: TP7.1 4880,3960 5045,3960 5043.25,3958.25 TP4.1
  Bottom Layer, Bottom w90: TP7.1@4880,3960 TP7.1 TP7.1@4880,3966.2
  Bottom Layer, Bottom w100: J1.1 3955,5555 v1(4590,5556.2) 4620,5556.2 4620,5040 4870,4791.2 4870,4470 4765,4365 4765,3966.2 TP7.1@4880,3966.2 ; J3.4 4778.21,3618.21 4865,3705 4865,3945 TP7.1@4880,3960
VCC: C2.1 D2.2 D2.5 J5.2 R1.1 R5.1 R7.1 U1.20 U2.3 VR1.3 | length 1105.9
  Top Layer, Top w10: D2.2 D2.5 3720.59,4014.41 v1(3735,4000)
  Top Layer, Top w25: U1.20 v1(3900,4706.2) ; v1(4630,4246.2) 4650,4226.2 U2.3 ; R5.1 R7.1 v1(4770,4585)
  Top Layer, Top w50: VR1.3 4365,5230 4680,5230 R1.1 4750,5375 C2.1
pads on no net: J3.3 J3.5 J3.7 J4.3 J4.7 J5.6 U1.2 U1.3 U1.4 U1.5 U1.6 U1.7 U1.11 U1.12 U1.14 U1.25 U2.5

## Polygon pours and split planes (outlines as drawn)
GND on Top Layer, Top "Top Layer, Top-GND" (solid, pour order 2): 3425,5975 3425,3125 4900,3125 4900,5975
GND on Bottom Layer, Bottom "Bottom Layer, Bottom-GND" (solid, pour order 4): 3425,5975 3425,3125 4900,3125 4900,4250 4825,4250 4825,4340 4900,4415 4900,5975
VCC on Internal Plane 2, VCC (split plane): 4920,3115.1 3415.1,3115.1 3415.1,5984.9 4920,5984.9
GND on Internal Plane 1, GND (split plane): 4920,3115.1 3415.1,3115.1 3415.1,5984.9 4920,5984.9

## Keep-outs
Keep-Out Layer, Board:
  lines w10: 4929,3599 4929,3162 ccw(c4960,3162) 4991,3162 4991,3600 ccw(c4960,3600) 4929,3600 ; 4991,4438 cw(c4960,4438) 4929,4438 4929,4876 cw(c4960,4876) 4991,4876 4991,4439 ; 4991,4969 cw(c4960,4969) 4929,4969 4929,5407 cw(c4960,5407) 4991,5407 4991,4970 ; 4991,5500 cw(c4960,5500) 4929,5500 4929,5938 cw(c4960,5938) 4991,5938 4991,5501 ; 3400,3100 8100,3100 8100,6000 3400,6000 3400,3100 ; 4929,3693 ccw(c4960,3693) 4991,3693 4991,3873 ccw(c4960,3873) 4929,3873 4929,3693

## Other copper
Bottom Layer, Bottom:
  text "Simmers" at 4575,5865.88 h18.75
  text "Engineering" at 4575,5825 h18.75
Internal Plane 1, GND (plane layer: these items are gaps in the copper):
  region: 4920,6000 8100,6000 8100,3100 4920,3100
Internal Plane 2, VCC (plane layer: these items are gaps in the copper):
  region: 4920,6000 8100,6000 8100,3100 4920,3100

## Silkscreen, mask and mechanical layers (free items; w line width, h text height)
Top Overlay, Top Silk:
  lines w10: 4137.5,5224.95 4900,5224.95 ; 4137.5,5231.2 4137.5,6006.2
  text "04-        R" at 3435,5970 h56.25 r270
  text "HIGH VOLTAGE" at 5505.62,5824.95 h75
  text "DANGER!!!" at 7187.5,5749.9 h75
  text "SECTION" at 5505.62,5662.45 h75
  text "PCB Rev" at 7275,3150 h56.25
  text "04-" at 6775,3139.75 h56.25
Mechanical 1, Top Assy:
  lines w10: 5299.96,7199.85 cw(c5610.67,7114.85) 5574.77,7434.97 ; 5345.02,7200.09 cw(c5602.59,7135.4) 5579.91,7399.99 ; 5400,7249.95 7900,7249.95 ; 5400,7449.95 7900,7449.95 ; 5575,7250 5575,7450 ; 7725,7250 7725,7450 ; 3400,7125 8100,7125 8100,7200 3400,7200 3400,7125 ; 5000,7500 8100,7500 8100,7600 5000,7600 5000,7500
  text "SIDE VIEW" at 6125,6717.5 h100
  text "TOP ASSY" at 5200,2792.5 h100
  text "02-        -D" at 14375,1302.5 h112.5
Mechanical 2, Bot Assy:
  lines w10: 3772.5,3867.5 3772.5,4182.5 ; 4127.5,5427.5 4127.5,5742.5 ; 7932.5,3382.5 7932.5,3697.5 ; 7932.5,5417.5 7932.5,5732.5 ; 3615,4025 ccw(c3772.5,4025) 3930,4025 ; 3615,4025 cw(c3772.5,4025) 3930,4025 ; 3615,4025 3930,4025 ; 3970,5585 cw(c4127.5,5585) 4285,5585 ; 3970,5585 ccw(c4127.5,5585) 4285,5585 ; 3970,5585 4285,5585 ; 7775,3540 cw(c7932.5,3540) 8090,3540 ; 7775,3540 ccw(c7932.5,3540) 8090,3540 ; 7775,3540 8090,3540 ; 7775,5575 cw(c7932.5,5575) 8090,5575 ; 7775,5575 ccw(c7932.5,5575) 8090,5575 ; 7775,5575 8090,5575
  text "Place Rubber Feet on Solder Side of PCB Here" at 7190,6809.75 h56.25
  text "BOTTOM ASSY" at 6200,2792.5 h100
Mechanical 3, Assy Dwg:
  text "NOTES:" at 2400,2179.17 h75
  text "1. THIS ASSEMBLY TO BE MANUFACTURED TO MEET ALL ACCEPTANCE" at 2400,2020.83 h75
  text "LEVELS OF A CLASS 2 ASSEMBLY PER ANSI/IPC-A-610B." at 2400,1862.5 h75
  text "2. ALL UNUSED COMPONENTS SHALL BE FREE OF SOLDER" at 2700,1720 h75
  text "3. ALL COMPONENTS SHALL BE MOUNTED FLUSH TO THE BOARD, EXCEPT AS NOTED." at 2700,1520 h75
  text "4. FINISHED BOARD SHELL BE FREE OF ALL RESIDUES." at 2700,1312.5 h75
  text "5. ALL LEADS SHALL BE TRIMED TO A MAXIMUM LENGTH OF 0.045" at 2700,1120 h75
Mechanical 5, Crop Marks:
  lines w10: 3400,3600 3400,3100 3900,3100 ; 3400,5500 3400,6000 3900,6000 ; 7600,3100 8100,3100 8100,3600 ; 7600,6000 8100,6000 8100,5500
Mechanical 6, Dims:
  lines w8: 12025,4650 12930,4650 12930,4850 12025,4850 12025,4650 ; 13650,4650 13875,4650 13875,4850 13650,4850 13650,4650
  text "MATERIAL:  Isola IS410 FR-4 or Equivalent" at 10350,7520 h75
  text "THICKNESS:  0.062\" +/- 0.005\"" at 10350,7320 h75
  text "PLATING: 1 OZ. COPPER" at 10350,7120 h75
  text "LAYER COUNT:  4" at 10350,6920 h75
  text "CONTROLLED IMPEDENCE:  NO" at 10350,6720 h75
  text "FINISH:" at 10350,6370 h75
  text "SOLDERMASK OVER BARE COPPER (SMOBC) with ENTEK" at 10350,6170 h75
  text "SOLDERMASK TYPE:  DYNACHEM EPIC 200 LPI OR EQUIVALENT." at 10350,5770 h75
  text "SOLDERMASK COLOR:  DB6500 BLUE" at 10350,5570 h75
  text "SILKSCREEN COLOR:  YELLOW INK" at 10350,5370 h75
  text "USE ARTWORK SET NUMBER:" at 10350,4670 h75
  text "05-" at 12050,4670 h75
  text "R" at 12675,4670 h75
  text "REVISION:" at 13000,4670 h75
  text "ANY ALTERNATIVES TO THE ABOVE SPECIFICATIONS MUST BE" at 10350,4220 h75
  text "APPROVED BY THE ENGINEERING DEPARTMENT AT MICROCHIP." at 10350,4070 h75
  text "THIS PCB TO BE MANUFACTURED TO MEET ALL ACCEPTANCE LEVELS" at 10350,3770 h75
  text "OF A CLASS 2 PCB PER ANSI/IPC-A-600F." at 10350,3620 h75
  text "ALL DIMENSIONS ARE IN INCHES." at 10350,3270 h75
  text "04-" at 14375,1302.5 h112.5
Mechanical 8, Mechanical:
  lines w10: 5500,4549.95 8000,4549.95 ; 6737.5,3299.95 6737.5,5799.95
Mechanical 9, Title:
  text "2.2" at 13035.62,9627.5 h62.5
  text "01/31/06" at 15738.75,9627.5 h62.5
  text "Full Production Release" at 13305,9622.5 h62.5
  text "2.3" at 13035.62,9477.5 h62.5
  text "02/01/06" at 15738.75,9477.5 h62.5
  text "Move parts on the bottom side to Top side" at 13305,9472.5 h62.5

## Dimensions
5325,5874.95 to 8100,3100 on Mechanical 8, Mechanical
7975,5874.95 to 8100,3100 on Mechanical 8, Mechanical
3400,6000 to 4225,5900 on Mechanical 8, Mechanical
4225,5900 to 4225,4300 on Mechanical 8, Mechanical
7975,5874.95 to 8100,3100 on Mechanical 8, Mechanical
7975,3224.95 to 8100,3100 on Mechanical 8, Mechanical
3400,3100 to 4225,5900 on Mechanical 8, Mechanical
4952.85,5736.83 to 5362.15,6602.56 on Mechanical 6, Dims
3400,6000 to 8100,6000 on Mechanical 6, Dims
3400,3100 to 3400,6000 on Mechanical 6, Dims
7931.59,3553.89 to 7502.91,6870 on Mechanical 2, Bot Assy
3790.8,4005.49 to 4862.09,6875 on Mechanical 2, Bot Assy
7924.65,5561.76 to 7500.84,6867.91 on Mechanical 2, Bot Assy
4110.39,5610.39 to 4858.81,6875 on Mechanical 2, Bot Assy
7493.29,5386.91 to 7923.13,4550 on Mechanical 1, Top Assy
6037.23,3737.5 to 7589.43,4459.89 on Mechanical 1, Top Assy
5967.77,5362.88 to 7617.21,4557.14 on Mechanical 1, Top Assy
5376.17,7344.18 to 4756.56,7500 on Mechanical 1, Top Assy
8200,7550 to 8255.94,7550 on Mechanical 1, Top Assy
8200,7200 to 8308.42,7198.26 on Mechanical 1, Top Assy
7839.8,7317.55 to 8079.34,7321.03 on Mechanical 1, Top Assy
7502.85,3737.5 to 7943.68,4487.68 on Mechanical 1, Top Assy